# Altium PCB STM32F103.PcbDoc (part 3 of 5)
Units mil, origin at the board's own origin, x right, y up, seen from the top; angles counter-clockwise.
Board outline 3951 x 3526 mil, 2 copper layers (Top Layer, Bottom Layer); 148 components, 169 nets, 748 pads, 448 vias.
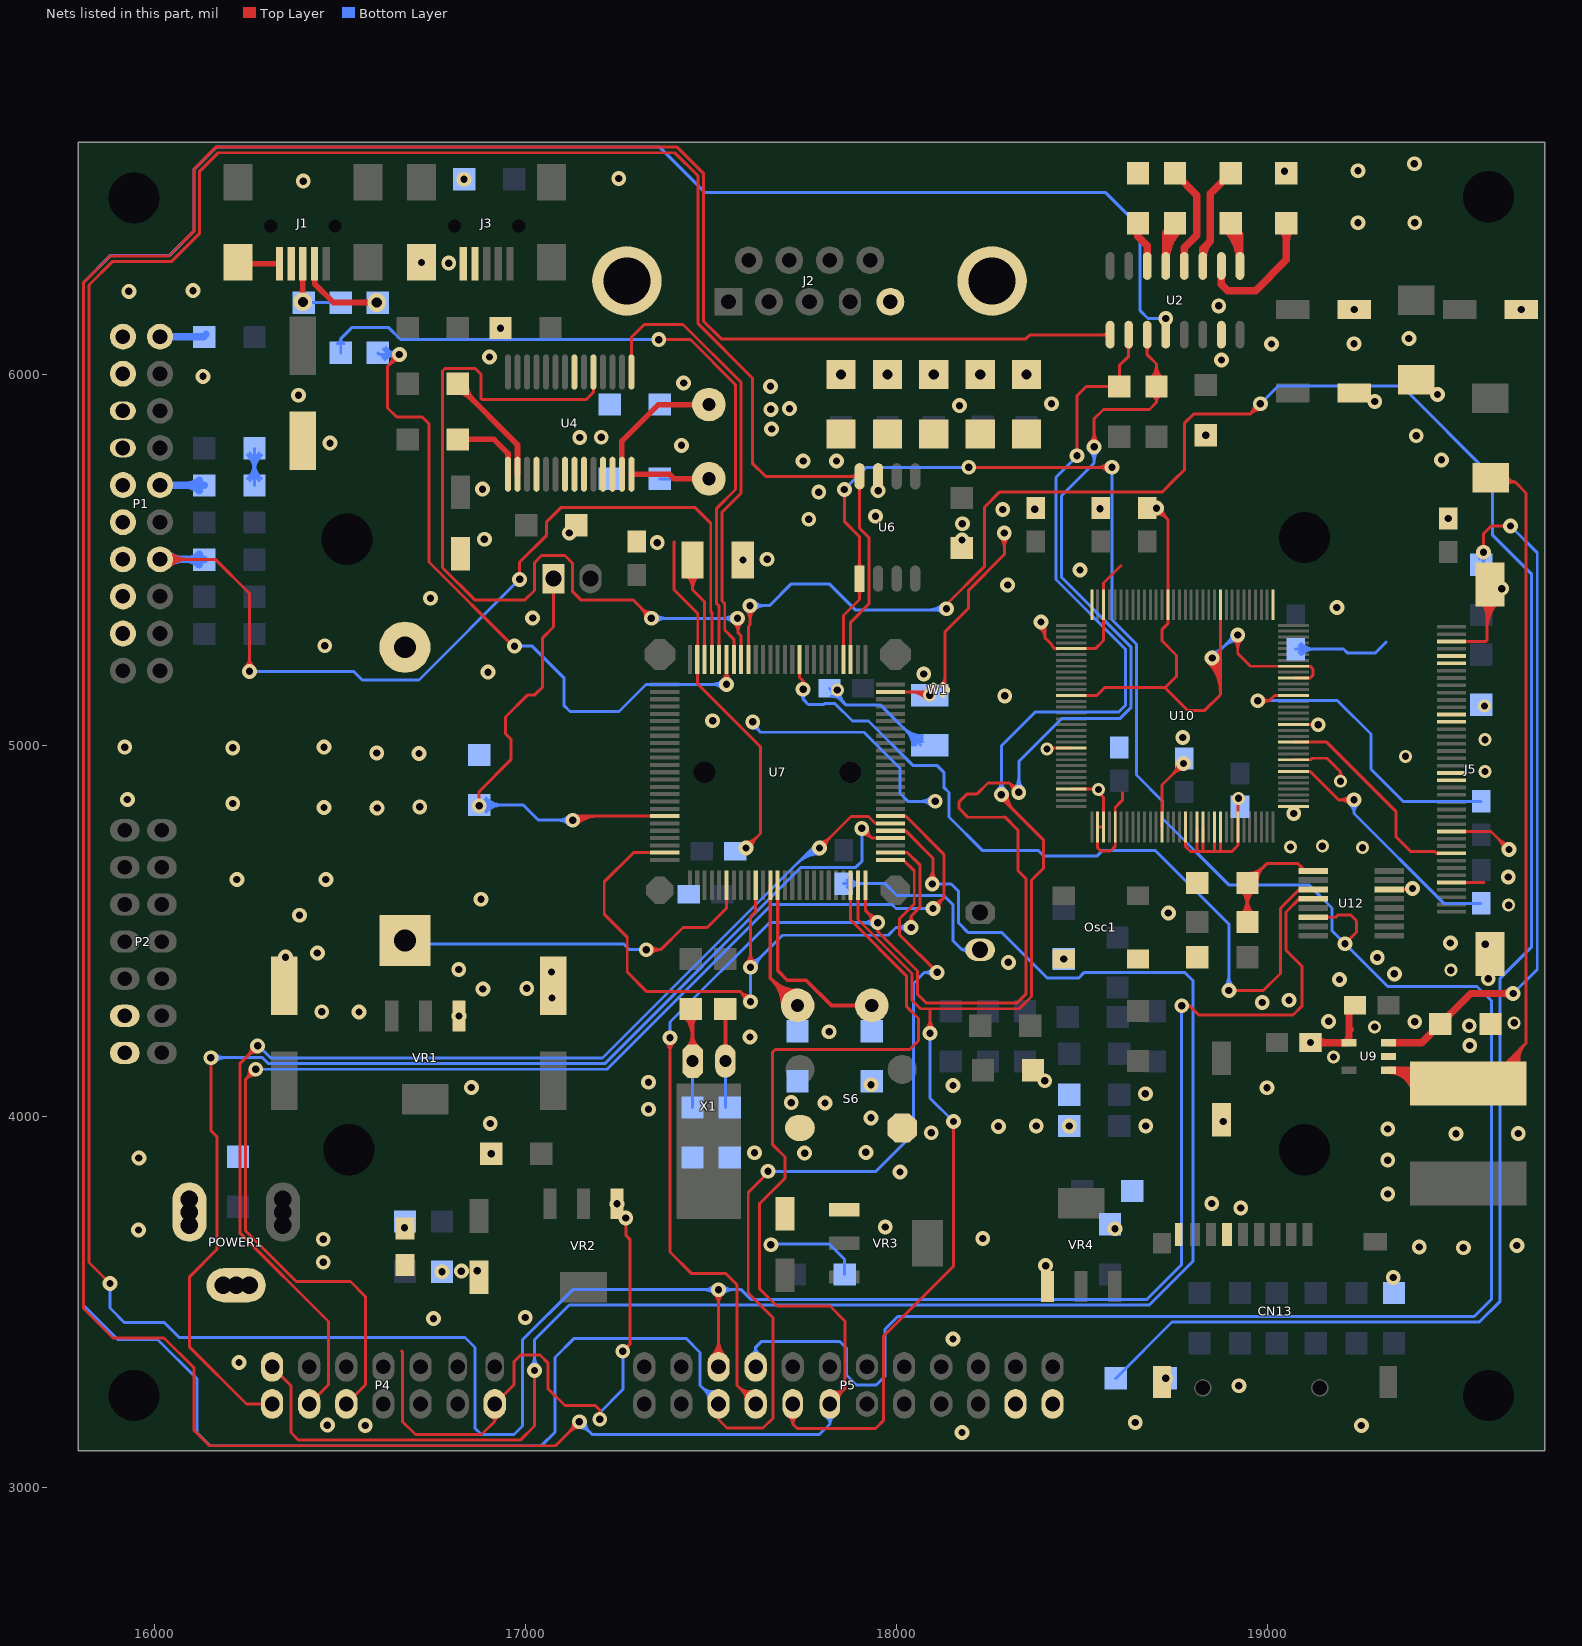
[diagram p3: the nets of this part, all layers, seen from the top]

## Via types
v1: diameter 40, hole 19.68, Top Layer to Bottom Layer, 402 vias
v2: diameter 35, hole 19.68, Top Layer to Bottom Layer, 21 vias
v3: diameter 50, hole 27.56, Top Layer to Bottom Layer, 19 vias
v4: diameter 40, hole 20, Top Layer to Bottom Layer, 6 vias

## Nets (pads, with @x,y where several pads share a name; then routed paths per layer and width w, separated by ;. In a path a pad name is that pad's centre, name@x,y a point inside that pad or via, vN(x,y) a via of type N, cw(c..) or ccw(c..) an arc to the next point about the centre after c; other vN are vias at no path point) (continued)
GND: BT1.2 C1.2 C2.2 C3.2 C4.2 C5.2 C6.2 C7.2 C8.1 C10.1 C12.1 C13.2 C14.1 C15.1 C16.1 C17.1 C18.2 C19.2 C20.1 C21.2 C22.2 C23.2 C24.2 C26.1 C30.2 C31.2 C32.2 C33.2 C34.1 C40.2 C41.1 C42.1 C43.1 C44.1 C45.2 C46.2 C47.2 C48.1 C49.2 C50.2 C58.1 C59.2 C60.2 C61.2 C62.2 C63.2 C64.2 C65.2 C66.2 C67.2 C68.1 CN13.6 CN13.9 D1.2 D2.2 D5.2 D6.2 D8.2 D9.2 D10.1 J1.4 J1.5 J1.6 J2.5 J2.10 J2.11 J3.4 J3.5 J3.6 J5.3 J5.5 J5.6 J5.13 J5.14 J5.21 J5.22 J5.29 J5.36 J5.41 J5.42 K2.2 L3.1 Osc1.2 P1.4 P1.6 P1.8 P1.10 P1.12 P1.14 P1.16 P1.18 P1.20 P2.11 P2.13 P4.13 P5.21 P5.23 POWER1.2 R41.1 R45.1 S6.1 U2.15 U4.7 U4.18 U4.21 U4.22 U4.23 U4.25 U4.26 U6.7 U7.10 U7.27 U7.74 U7.99 U9.2 U10.2 U10.3 U10.5 U10.13 U10.17 U10.19 U10.20 U10.22 U10.23 U10.26 U10.33 U10.41 U10.47 U10.55 U10.57 U10.65 U10.74 U10.83 U10.94 U10.96 U10.101 U10.109 U10.118 U10.125 U12.6 VR1.1 VR2.1 VR3.1 VR4.1 W1.1 | length 13935.4
  Top Layer w8: 16666,3369 16668,3367 16668,3179 16703.5,3143.5 16881.5,3143.5 16917,3179 ; P4.13@16908.19,3191.54 cw(c16903.68,3179) 16917,3179 ; P4.13@16925.81,3191.54 ccw(c16930.32,3179) 16917,3179 ; v4(17200,3185) 17200,3210 17188,3222 17106,3222 17060,3268 17060,3337 17039,3358 16987,3358 16969,3340 16969,3278 P4.13@16917,3226 16917,3179 ; v4(17262,3368) 17281,3387 17281,3670 17270,3681 v1(17270,3727) ; U7.99@17375.09,4711.6 17290.6,4711.6 17212,4633 17212,4545.43 17274,4483.43 17274,4389.79 17326.79,4337 17579,4337 ; 17401,5549 17400,5549 17400,5420 17464,5356 17464,5233.58 U7.74@17462.69,5232.27 17462.69,5167.15 17633,4996.84 17633,4852 ; U7.74@17461.63,5267.2 ccw(c17455.89,5272.93) 17464,5272.93 ; v1@17590,4310.13 ccw(c17552.44,4310.44) 17579,4337 ; v1(17594,4724) 17633,4763 17633,4852 ; v1@17594,4740 ccw(c17594,4778.63) 17621.31,4751.31 ccw(c17648.63,4724) v1@17610,4724 ; v1@17594.69,4414.31 ccw(c17567.37,4441.63) 17606,4441.63 ccw(c17644.63,4441.63) v1@17617.31,4414.31 ; v1@17605.87,4326 cw(c17605.56,4363.56) 17579,4337 ; v1(17606,4310) 17579,4337 ; v1(17606,4403) 17606,4538.83 17620.17,4553 U7.10@17620.17,4588 ; 17633,4781 17633,4852 ; U7.27@17983.35,4711.6 18029.4,4711.6 18062.32,4678.68 18062.32,4564.32 18039,4541 ; v1@18029.73,4523.04 ccw(c18016.97,4541) 18039,4541 ; v1(18039,4510) 18039,4541 ; v1@18048.27,4523.04 cw(c18061.03,4541) 18039,4541 ; W1.1@18122.22,5165.78 ccw(c18103.44,5184.56) 18130,5184.56 ; W1.1@18130,5158 18130,5307 18193.88,5370.88 18193.88,5418.66 18290,5514.79 v1(18290,5573) ; v1@18278.69,5561.69 cw(c18251.37,5534.37) 18290,5534.37 cw(c18328.63,5534.37) v1@18301.31,5561.69 ; v1@18381.64,5318.79 cw(c18366.02,5288.62) 18400,5288.62 ; v1@18385.32,5325.9 cw(c18372.83,5301.77) 18400,5301.77 ; v1(18389,5333) cw(c18379.64,5314.92) 18400,5314.92 ; v1@18401,5330 18400,5329 18400,5290 18418.45,5271.55 18418.45,5268.29 18425.64,5261.1 U10.101@18470.79,5261.1 18535.1,5261.1 18557.4,5283.4 U10.94@18557.4,5379.21 18557.4,5438.47 18602.94,5484 18604,5484 ; v2(18405,4991) 18407.39,4993.39 U10.118@18470.79,4993.39 ; 18422.35,5264.39 ccw(c18430.93,5272.96) U10.101@18433.45,5261.1 ; U10.125@18470.79,4883.15 18534.85,4883.15 18557.4,4860.6 U10.3@18557.4,4780.79 U10.2@18541.65,4780.79 ; U10.109@18470.79,5135.12 18539.12,5135.12 18560,5156 18723.21,5156 ; U10.2@18541.65,4771 18541.65,4724.35 18550,4716 18576,4716 18588.9,4728.9 U10.5@18588.9,4780.79 18588.9,4833.5 18608,4852.6 18608,4873 ; v2@18544,4868.5 cw(c18544,4855.22) 18553.39,4864.61 ; C65.2@18672.82,5645.78 cw(c18679.53,5612.61) v1@18703.46,5636.54 ; C65.2@18674.41,5637.94 cw(c18683.08,5595.07) v1@18714,5626 ; C65.2@18675.99,5630.1 cw(c18686.62,5577.54) 18724.54,5615.46 ; v1@18700,5624 cw(c18700,5585.37) 18727.31,5612.69 cw(c18754.63,5640) v1@18716,5640 ; v1(18700,5640) 18730.63,5609.37 18730.63,5466.99 U10.83@18730.63,5379.21 18730.63,5328.6 18715.38,5313.35 18715.38,5281.62 18754,5243 18754,5186.79 18723.21,5156 ; U10.13@18714.88,4780.79 18714.88,4893.88 v1(18773,4952) ; v1@18757,4952 cw(c18718.37,4952) 18745.69,4924.69 cw(c18773,4897.37) v1@18773,4936 ; U10.17@18777.87,4780.79 18777.87,4729.13 18792,4715 18810,4715 ; U10.19@18809.37,4780.79 18809.37,4715.63 18810,4715 ; U10.20@18825.12,4780.79 18825.12,4717.12 18823,4715 ; v1@18838.69,5224.69 cw(c18757.39,5143.39) 18872.36,5143.39 ; v1@18844.34,5230.34 cw(c18776.7,5162.7) 18872.36,5162.7 ; v1(18850,5236) cw(c18796.01,5182.01) 18872.36,5182.01 ; v1@18855.66,5241.66 cw(c18815.33,5201.33) 18872.36,5201.33 ; U10.22@18856.61,4780.79 18856.61,4718.61 18853,4715 ; v1@18861.31,5247.31 cw(c18834.64,5220.64) 18872.36,5220.64 ; 18866.97,5252.97 cw(c18853.95,5239.95) 18872.36,5239.95 ; U10.23@18872.36,4780.79 18872.36,4717.36 18870,4715 ; U10.74@18872.36,5379.21 18872.36,5137.36 18829,5094 18785.21,5094 18723.21,5156 ; v1@18907.69,5286.69 cw(c18880.37,5259.37) 18919,5259.37 cw(c18957.63,5259.37) v1@18930.31,5286.69 ; v1(18919,5298) 18919,5248 18953.14,5213.86 U10.57@19069.21,5213.86 19114.36,5213.86 19121.55,5206.67 19121.55,5189.55 19114.36,5182.36 U10.55@19069.21,5182.36 ; v2(18921,4858) 18919.61,4856.61 U10.26@18919.61,4780.79 18919.61,4731.61 18903,4715 18870,4715 ; U10.41@19069.21,4961.89 19115.89,4961.89 19120,4966 ; U10.47@19069.21,5056.38 v1@19146.62,5056.38 ; U10.57@19106.55,5213.86 cw(c19108.5,5200.19) 19118.26,5209.95 ; 19153.79,4966 19140,4966 ; v2@19188.48,4915.21 ccw(c19179.03,4929.31) 19196,4929.31 ; v2(19196,4904) 19196,4929.31 ; v2@19203.52,4915.21 cw(c19212.97,4929.31) 19196,4929.31 ; U12.6@19327.36,4612.5 19381.5,4612.5 v1@19387,4619 ; U12.6@19361.6,4609.76 cw(c19368.21,4603.15) 19368.21,4612.5 cw(c19368.21,4621.85) U12.6@19361.6,4615.24 ; J5.36@19495,4631.03 19581.97,4631.03 ; J5.29@19495,4768.82 19601.18,4768.82 v1(19649.7,4720.3) ; J5.3@19495,5280.63 19587.63,5280.63 19590,5283 J5.41@19590,5441 ; J5.41@19573.34,5389.48 cw(c19533.1,5349.25) 19590,5349.25 ; J5.41@19578.99,5395.13 cw(c19552.42,5368.56) 19590,5368.56 ; 19590,5308.95 cw(c19703.89,5308.95) J5.41@19623.36,5389.48 ; 19590,5328.26 cw(c19684.57,5328.26) J5.41@19617.7,5395.13 ; 19590,5347.57 cw(c19665.26,5347.57) J5.41@19612.04,5400.79 ; 19590,5366.89 cw(c19645.94,5366.89) J5.41@19606.39,5406.45 ; v1@19633.7,4720.3 ccw(c19595.07,4720.3) 19622.38,4747.62 ccw(c19649.7,4774.93) v1@19649.7,4736.3 ; U7.10@17620.17,4588 U7.10@17620.17,4624 U7.10@17620.17,4588 ; 18810,4715 18823,4715 ; 18823,4715 18853,4715 ; 18853,4715 18870,4715 ; 19120,4966 19140,4966 ; 19120,4966 19140,4966 ; 19140,4966 19159.31,4966 19196,4929.31
  Top Layer w15: J1.6@16228.74,6297.94 J1.5@16337.01,6297.94
  Bottom Layer w8: v4(17200,3185) 17199,3184 17199,3202 17262,3265 v4(17262,3368) ; v1(17606,4310) v1(17606,4403) 17692,4489 17977,4489 17998,4510 v1(18039,4510) ; v1@17606,4419 ccw(c17606,4457.63) 17633.31,4430.31 ccw(c17660.63,4403) v1@17622,4403 ; v1@17612,5048 cw(c17612,5026.27) 17627.36,5041.64 ; v1@17613,5056 17633,5036 17911.85,5036 18009,4938.85 18009,4871 18030,4850 v1(18104,4850) ; v1@17626.45,5057.14 ccw(c17640.48,5050.48) 17629.5,5039.5 ; v4(17661,3655) 17663,3657 17818,3657 17860,3615 C45.2@17860,3575 ; C44.1@17819,5154 17863,5110 17956,5110 C40.2@18064,5002 ; C44.1@17824,5133 cw(c17824,5094.37) 17851.31,5121.69 ; C44.1@17836.98,5153.33 ccw(c17873.98,5151.41) 17847.78,5125.22 ; C44.1@17844.7,5147.15 ccw(c17859.66,5138.08) 17847.29,5125.71 ; C44.1@17844.97,5152.91 ccw(c17898.15,5150.16) 17860.5,5112.5 ; v2@17851.54,5143 ccw(c17868.63,5132.63) 17854.5,5118.5 ; C26.1@17857,4628 17969,4628 18001,4596 18127,4596 18152,4571 18152,4474 18176,4450 ; C26.1@17866.19,4618.81 cw(c17888.38,4596.62) 17888.38,4628 cw(c17888.38,4659.38) C26.1@17866.19,4637.19 ; C26.1@17871.85,4613.15 cw(c17907.7,4577.3) 17907.7,4628 cw(c17907.7,4678.7) C26.1@17871.85,4642.85 ; 18017.79,5048.21 ccw(c18069,5099.43) C40.2@18069,5027 ; 18027.44,5038.56 cw(c17989.89,5001) C40.2@18043,5001 ; v1@18027.69,4498.69 ccw(c18000.37,4471.37) 18000.37,4510 ccw(c18000.37,4548.63) v1@18027.69,4521.31 ; 18031.44,5034.56 ccw(c18069,5072.11) C40.2@18069,5019 ; C40.2@18041.1,5024.9 cw(c18017.2,5001) C40.2@18051,5001 ; C40.2@18045.1,5020.9 ccw(c18069,5044.8) C40.2@18069,5011 ; v1@18092.69,4838.69 ccw(c18065.37,4811.37) 18065.37,4850 ccw(c18065.37,4888.63) v1@18092.69,4861.31 ; K2.2@18191,4440 ccw(c18176,4433.75) 18176,4450 ; K2.2@18191,4460 cw(c18176,4466.25) 18176,4450 ; K2.2@18225,4450 18176,4450 ; v1(18773,4952) C67.2@18773,4953 ; v1(18850,5236) 18912,5298 v1(18919,5298) ; v1@18850,5252 ccw(c18850,5290.63) 18877.31,5263.31 ccw(c18904.63,5236) v1@18866,5236 ; 18879.74,5265.74 cw(c18919,5226.47) v1@18919,5282 ; 18893.39,5279.39 cw(c18919,5253.79) v1@18919,5290 ; 18896.64,5282.64 ccw(c18881.27,5298) v1@18903,5298 ; C63.2@19075,5260 19203.92,5260 19213.92,5250 19290,5250 19319,5279 ; C63.2@19084.19,5250.81 cw(c19106.38,5228.62) 19106.38,5260 cw(c19106.38,5291.38) C63.2@19084.19,5269.19 ; C63.2@19089.85,5245.15 cw(c19125.7,5209.3) 19125.7,5260 cw(c19125.7,5310.7) C63.2@19089.85,5274.85 ; v1@19146.62,5056.38 v1@19147,5056 ; v1@19486,5611 19486.48,5611.48 v1(19486.48,5612) ; 19613,5446 19630,5429 v1(19630,5423)
  other v1: 18176,3149 16568,3168 19252,3168 16466,3169 18643,3176 18922,3275 16228,3338 18152,3401 16752,3456 16999,3459 19338,3567 16775,3582.5 16827,3584 16870,3585 18401.45,3598.81 16455,3608 19527,3647 19408,3649 19671,3653 16455,3670 18232,3672 15957,3695 18588,3698 17969,3703 18927,3754 17246.55,3765.2 18849,3766 19323,3792 18009,3851 19323,3883 15958,3889 16907.5,3900 17752,3902 17617,3903 17917,3904 19507,3954 19675,3955 18093,3957 19323,3967 18274,3974 18376,3975 18465,3975 18671,3975 16905,3982 18880,3987.32 17931,3997 17331,4020 17807,4037 17716,4038 18670,4062 18998,4078 16854,4079 18152,4084 17931,4086 17331,4093 18399,4097 19544,4192 17605,4215 17818,4229 19543,4245 19396,4256 19164,4257 16820.55,4271.2 16551,4282 16451,4283 18985,4308 19057,4314 17071,4320 16885,4344 17003,4346 19193,4370 19594,4372 19341,4385 17070,4390 16820,4397 18301,4416 19295,4429 16353,4430 16439,4441 19586,4465 19492,4468 16391,4543 18732,4549 16880,4586 19390,4615 16222,4639 16462,4639 19648,4646 19070,4817 16600,4832 16457,4833 16715,4835 16211,4844 15927,4855 16713,4979 16599,4980 16211,4994 15920,4996 16457,4996 18771,5022 19136,5056.38 17612,5064 17504,5067 18291,5134 18073,5193 16899,5198 16459,5269 17019,5344 19186,5372 16744,5397 18299,5433 18494,5473 17586,5500 17651,5502 17355,5547 18176,5554 16889,5556 17118,5573 18177,5598 17763,5610 17943,5618 18286,5636 18372,5637 18548,5638 17790,5683 17950,5687 16884,5691 17748,5767 17838,5767 19468,5770 17420,5809 16473,5815 17146,5830 17204,5831 19400,5835 18833,5836.5 17663,5853 17661,5906 17711,5908 18169,5916 18417,5921 19288,5927 16388,5944 19457,5946 17660,5968 17426,5977 16131,5995 18875,6039 16903,6047 19010,6082 19232,6083 19380,6097 16932.5,6125 19232.68,6175 19682.68,6175 18868,6185 15931,6224 16104,6226 16793,6300 16719.8,6301.88 19243,6409 19396,6409 16401,6521 16834,6526 17251,6528 19045,6547.5 19243,6549 19395,6568
  other v2: 19177,4161 19288,4242 19664,4253 19493,4395 19649,4570 19255,4725 19061,4727 19147,4729 18544,4882 19585,4930 19371,4971 19585,5016 19584,5107 17840,5150
HSYNC: J5.32 U10.44 | length 597.9
  Top Layer w8: U10.44@19069.21,5009.13 19158.6,5009.13 19346,4821.73 19346,4754 19385,4715 19449.52,4715 19454.76,4709.77 J5.32@19495,4709.77 ; 19452.46,4712.06 ccw(c19457.33,4716.94) J5.32@19460.21,4710.67
INT: U7.60 U12.11 | length 2348
  Top Layer w8: U7.60@17738.28,5232.27 17738.28,5183.72 17748,5174 ; v1@17743.07,5167.22 ccw(c17740.88,5174) 17748,5174 ; 17743.36,5178.64 cw(c17726.75,5162.02) v1(17748,5152) 17748,5174 ; v1@17752.93,5167.22 cw(c17755.12,5174) 17748,5174 ; v1(18895,4340) 18988,4340 19034,4386 19034,4561.66 19084.84,4612.5 U12.11@19122.64,4612.5
  Bottom Layer w8: v1@17740.32,5137.97 cw(c17733.22,5125) 17748,5125 ; v1(17748,5152) 17748,5125 ; v1@17755.68,5137.97 ccw(c17762.78,5125) 17748,5125 ; v1@18883.69,4351.31 ccw(c18856.37,4378.63) 18895,4378.63 ccw(c18933.63,4378.63) v1@18906.31,4351.31 ; v1(18895,4340) 18895,4519 18696,4718 18555.16,4718 18539.16,4702 18397,4702 18381,4718 18230.57,4718 18140.94,4807.63 18140.94,4873.84 18127,4887.79 18127,4928 18108,4947 18043.28,4947 17924.28,5066 17881,5066 17834,5113 17806.16,5113 17804.16,5111 17762,5111 17748,5125
MISO: P5.6 U6.8 U7.53 U12.12 | length 11966.5
  Top Layer w8: v1(15880,3550.77) 15880.11,3550.89 15823.5,3607.5 15823.5,6241.29 15886.21,6304 16045.21,6304 16122,6380.79 16122,6547.79 16171.71,6597.5 17402.29,6597.5 17465,6534.79 17465,6136.79 17611,5990.79 17611,5761 17646.41,5725.59 U6.8@17900,5725.59 17900,5586 17925,5561 17925,5381.45 17876.07,5332.52 U7.53@17876.07,5232.27 ; P5.6@17501.62,3354.38 ccw(c17457.23,3398.77) 17520,3398.77 ccw(c17582.77,3398.77) P5.6@17538.38,3354.38 ; P5.6@17507.27,3348.73 ccw(c17476.54,3379.46) 17520,3379.46 ccw(c17563.46,3379.46) P5.6@17532.73,3348.73 ; v1@17508.69,3522.69 cw(c17481.37,3495.37) 17520,3495.37 cw(c17558.63,3495.37) v1@17531.31,3522.69 ; P5.6@17520,3326 v1(17520,3534) ; U6.8@17893.08,5718.67 ccw(c17876.39,5701.98) 17876.39,5725.59 ccw(c17876.39,5749.2) U6.8@17893.08,5732.5 ; v1(18768,4299) 18788.57,4299 ; v1@18783.51,4295.06 cw(c18788.57,4293.78) 18788.57,4299 ; v1@18783.51,4302.94 ccw(c18788.57,4304.22) 18788.57,4299 ; U12.12@19122.64,4587.5 19084.5,4587.5 19049,4552 19049,4448.79 19092.64,4405.15 19092.64,4299.06 19067.57,4274 18814,4274 18788.78,4299.22 18788.57,4299
  Bottom Layer w8: v1(15880,3550.77) 15880,3484.64 15919.64,3445 16026.88,3445 16066.88,3405 16837,3405 16864,3378 16864,3292 ; 16864,3195 16864,3292 ; v1@17508.69,3522.69 ccw(c17481.37,3495.37) 17481.37,3534 ccw(c17481.37,3572.63) v1@17508.69,3545.31 ; v1@17531.31,3522.69 cw(c17558.63,3495.37) 17558.63,3534 cw(c17558.63,3572.63) v1@17531.31,3545.31 ; v1(18768,4299) 18767,4299 18767,3600.43 18674.57,3508 17607,3508 17581,3534 v1(17520,3534) 17127,3534 16992,3399 16992,3167 16968.5,3143.5 16881,3143.5 16864,3160.5 16864,3292
MOSI: P5.8 U6.1 U7.54 U12.14 | length 6874.9
  Top Layer w8: U7.54@17856.39,5232.27 17856.39,5350.39 17900,5394 U6.1@17900,5450 17900,5563 17860,5603 17860,5689 v1(17859,5690) ; U6.1@17893.08,5421.43 cw(c17876.39,5404.73) 17900,5404.73 cw(c17923.61,5404.73) U6.1@17906.92,5421.43 ; U6.1@17893.08,5478.57 ccw(c17876.39,5495.26) 17900,5495.26 ccw(c17923.61,5495.26) U6.1@17906.92,5478.57 ; v1(18194,5750) v1(18580,5750) ; v1@18568.69,5738.69 ccw(c18541.37,5711.37) 18541.37,5750 ccw(c18541.37,5788.63) v1@18568.69,5761.31 ; U12.14@19122.64,4537.5 19182.78,4537.5 19189.28,4544 19223,4544 19239,4528 19239,4497 v1(19208,4466) ; U12.14@19156.87,4534.76 cw(c19163.49,4528.15) 19163.49,4537.5 cw(c19163.49,4546.85) U12.14@19156.87,4540.24
  Bottom Layer w8: P5.8@17607.92,3359.02 ccw(c17597.45,3379) 17620,3379 ; P5.8@17620,3326 17620,3379 ; P5.8@17632.08,3359.02 cw(c17642.55,3379) 17620,3379 ; v1(17859,5690) 17919,5750 v1(18194,5750) v1@18193,5751 ; v1(18580,5750) 18580,5338.85 18646,5272.85 18646,4920.84 18716.42,4850.42 18716.42,4803.65 18895.07,4625 19110.57,4625 19173,4562.57 19173,4501 v1(19208,4466) 19323,4351 19564,4351 19603.21,4311.79 19603.21,3509.21 19556,3462 18003,3462 17968,3427 17968,3300 17945,3277 17892,3277 17865,3304 17865,3376 17847,3394 17635,3394 17620,3379
NetBT1_1: BT1.1 U7.6 | length 1008.7
  Top Layer w8: v1(17325,4450) 17364,4450 17424,4510 17489.43,4510 17541.43,4562 U7.6@17541.43,4624 ; v1@17336.31,4438.69 cw(c17363.63,4411.37) 17363.63,4450 cw(c17363.63,4488.63) v1@17336.31,4461.31
  Bottom Layer w8: BT1.1@16708,4465 17265,4465 17280,4450 v1(17325,4450)
NetC9_1: C9.1 U2.3 | length 324.1
  Top Layer w20: U2.3@18825,6292.52 18825,6339 18845,6359 18845,6487.5 C9.1@18900,6542.5 ; U2.3@18826.81,6318.11 cw(c18881.61,6318.11) 18842.86,6356.86
NetC9_2: C9.2 U2.1 | length 300.8
  Top Layer w8: C9.2@18900,6407.5 18900,6397 C9.2@18904,6397
  Top Layer w20: C9.2@18885.86,6393.36 cw(c18791.36,6298.86) U2.1@18925,6298.86 ; C9.2@18900,6407.5 cw(c18839.64,6347.14) 18925,6347.14 ; C9.2@18904,6397 18906,6397 18925,6378 U2.1@18925,6292.52
NetC10_2: C10.2 U2.2 | length 440.3
  Top Layer w20: U2.2@18875,6292.52 18875,6243 18892,6226 18967,6226 19050,6309 C10.2@19050,6407.5 ; C10.2@19035.86,6393.36 cw(c19001.72,6359.22) 19050,6359.22 cw(c19098.28,6359.22) C10.2@19064.14,6393.36
NetC11_1: C11.1 U2.5 | length 297.3
  Top Layer w20: U2.5@18725,6292.52 18725,6382.5 C11.1@18750,6407.5 ccw(c18810.36,6347.14) 18725,6347.14 ; U2.5@18725,6298.86 cw(c18858.64,6298.86) C11.1@18764.14,6393.36
NetC11_2: C11.2 U2.4 | length 288.5
  Top Layer w20: C11.2@18750,6542.5 18809,6483.5 18809,6375 18775,6341 U2.4@18775,6292.52
NetC12_2: C12.2 U2.6 | length 213.6
  Top Layer w20: C12.2@18650,6407.5 18650,6372 ; U2.6@18675,6292.52 18675,6347 18650,6372 ; 18650,6372 cw(c18671.5,6372) 18660.36,6390.39 ccw(c18671.5,6372) 18650,6372 ; 18650,6372 ccw(c18628.5,6372) 18639.64,6390.39 cw(c18628.5,6372) 18650,6372
NetC14_2: C14.2 U4.28 Y1.1 | length 346.2
  Top Layer w15: U4.28@17285.34,5731.2 17388.2,5731.2 17400.4,5719 Y1.1@17494,5719
  Bottom Layer w8: C14.2@17361.5,5719 17422.72,5719 ; 17422.73,5719 Y1.1@17494,5719
NetC16_2: C16.2 U4.27 Y1.2 | length 497
  Top Layer w15: U4.27@17259.75,5731.2 17259.75,5820.75 17358,5919 Y1.2@17494,5919
  Bottom Layer w8: C16.2@17361.5,5919 17427,5919 Y1.2@17494,5919
NetC22_1: C22.1 R23.1 X1.2 | length 323.1
  Top Layer w8: R23.1@17515,4285 17515,4290 R23.1@17515,4296
  Top Layer w10: R23.1@17515,4285 R23.1@17520,4290 ; X1.2@17538.5,4150 R23.1@17538.5,4273
  Bottom Layer w8: C22.1@17538.5,4025.5 X1.2@17538.5,4150 17538.5,4092.5
NetC23_1: C23.1 R24.1 X1.1 | length 529.4
  Top Layer w10: R24.1@17427.32,4272.32 cw(c17372.57,4217.57) 17450,4217.57 ; X1.1@17434.09,4183.41 ccw(c17395.68,4221.82) 17450,4221.82 ccw(c17504.32,4221.82) X1.1@17465.91,4183.41 ; R24.1@17434.39,4279.39 cw(c17396.72,4241.72) 17450,4241.72 cw(c17493.28,4241.72) R24.1@17462.68,4272.32 ; X1.1@17441.16,4176.34 ccw(c17419.82,4197.68) 17450,4197.68 ccw(c17480.18,4197.68) X1.1@17458.84,4176.34 ; X1.1@17450,4150 R24.1@17450,4285
  Bottom Layer w8: C23.1@17450,4025 X1.1@17450,4150
NetC24_1: C24.1 U7.73 | length 436.8
  Top Layer w8: C24.1@17432.22,5461.03 cw(c17393.78,5420) 17450,5420 ; C24.1@17437.69,5466.87 cw(c17411.08,5438.46) 17450,5438.46 cw(c17488.92,5438.46) C24.1@17462.31,5466.87 ; C24.1@17450,5500 17450,5420 ; C24.1@17467.78,5461.03 ccw(c17506.22,5420) 17450,5420 ; U7.73@17482.37,5232.27 17482.37,5387.63 17450,5420
NetC32_1: C32.1 U7.13 X2.2 | length 525.7
  Top Layer w10: U7.13@17679.22,4624 17679.22,4393.78 17705,4368 17756,4368 17824,4300 X2.2@17933,4300 X2.2@17931,4298
NetC33_1: C33.1 U7.12 X2.1 | length 698.9
  Top Layer w10: U7.12@17659.54,4624 17659.54,4451.47 17659.54,4373.47 X2.1@17733,4300 ; X2.1@17692.73,4300 ccw(c17595.49,4300) 17664.25,4368.75 ccw(c17733,4437.51) X2.1@17733,4340.28 ; X2.1@17702.73,4300 ccw(c17629.64,4300) 17681.32,4351.68 ccw(c17733,4403.37) X2.1@17733,4330.28 ; X2.1@17712.73,4300 ccw(c17663.78,4300) 17698.39,4334.61 ccw(c17733,4369.23) X2.1@17733,4320.28
NetC40_1: C40.1 U7.49 W1.2 | length 253.3
  Top Layer w8: U7.49@17983.35,5144.67 W1.2@18094,5144.67 ; 18035.48,5144.67 cw(c18035.48,5082.48) v2@18079.45,5126.45 ; 18054.79,5144.67 cw(c18054.79,5101.79) v2@18085.11,5132.11 ; 18066.82,5144.67 ccw(c18066.82,5182.18) W1.2@18093.34,5155.66 ; 18071.48,5144.67 ccw(c18071.48,5165.52) W1.2@18086.22,5150.78 ; W1.2@18086.13,5144.67 ccw(c18086.13,5162.87) W1.2@18099,5150
  other v2: 18089,5136
NetC48_2: C48.2 R40.1 U9.3 | length 2237.8
  Top Layer w8: v1(19581,5521) 19581,5571 19602,5592 v1(19654,5592)
  Top Layer w20: U9.3@19325,4199.8 19414.8,4199.8 C48.2@19465,4250 19547,4332 v1(19661,4332) ; v1@19653.93,4324.93 ccw(c19636.86,4307.86) 19636.86,4332 ccw(c19636.86,4356.14) v1@19653.93,4339.07
  Bottom Layer w8: R40.1@19568.1,5512.07 ccw(c19563.44,5529) v1@19581,5529 ; R40.1@19570.22,5504.35 ccw(c19566.33,5518.5) v1@19581,5518.5 ; R40.1@19572.88,5507.22 cw(c19564.5,5493) R40.1@19581,5493 ; R40.1@19575,5487 R40.1@19581,5493 ; R40.1@19589.12,5507.22 ccw(c19597.5,5493) R40.1@19581,5493 ; R40.1@19591.39,5507.19 cw(c19609.1,5529) v1@19581,5529 ; v1(19654,5592) 19726,5520 19726,4708 ; v1(19661,4332) 19726,4397 19726,4493 ; R40.1@19581,5493 v1(19581,5521) v1@19581,5529 ; 19726,4493 19726,4602.76 ; 19726,4493 19726,4602.76 ; 19726,4602.76 19726,4708 ; 19726,4602.76 19726,4708
NetC68_2: C68.2 L8.2 U12.9 | length 856.6
  Top Layer w8: L8.2@18926.62,4543.38 ccw(c18882.23,4587.77) 18945,4587.77 ccw(c19007.77,4587.77) L8.2@18963.38,4543.38 ; C68.2@18926.62,4611.62 cw(c18882.23,4567.23) 18945,4567.23 cw(c19007.77,4567.23) C68.2@18963.38,4611.62 ; L8.2@18932.27,4537.73 ccw(c18901.54,4568.46) 18945,4568.46 ccw(c18988.46,4568.46) L8.2@18957.73,4537.73 ; C68.2@18932.27,4617.27 cw(c18901.54,4586.54) 18945,4586.54 cw(c18988.46,4586.54) C68.2@18957.73,4617.27 ; L8.2@18945,4525 C68.2@18945,4630 18997,4682 19081.27,4682 19091.27,4672 ; C68.2@18945,4648 ccw(c18945,4691.46) 18975.73,4660.73 ccw(c19006.46,4630) C68.2@18963,4630 ; C68.2@18945,4656 ccw(c18945,4718.77) 18989.38,4674.38 ccw(c19033.77,4630) C68.2@18971,4630 ; 19086.46,4676.81 cw(c19079.44,4669.8) U12.9@19087.86,4664.55 ; U12.9@19088.43,4665.27 ccw(c19081.86,4672) 19091.27,4672 ; 19091.27,4671.55 ccw(c19100.19,4671.55) U12.9@19093.88,4665.24 ; 19091.38,4671.89 cw(c19081.99,4662.5) U12.9@19095.27,4662.5 ; U12.9@19122.64,4662.5 19091.27,4662.5 19091.27,4672
NetCB1_2: CB1.2 CB2.2 CB4.2 U9.4 | length 308.5
  Top Layer w20: CB1.2@19115,4199.8 U9.4@19218.7,4199.8 ; CB1.2@19122.07,4192.93 cw(c19138.67,4176.33) CB1.2@19138.67,4199.8 ; CB1.2@19122.07,4207.07 ccw(c19139.62,4224.62) CB1.2@19139.62,4199.8 ; CB1.2@19130.61,4189.39 cw(c19155.74,4164.26) 19155.74,4199.8 ; CB1.2@19130.61,4210.61 ccw(c19156.69,4236.69) 19156.69,4199.8 ; 19216.7,4210 19218.7,4212 19218.7,4297.7 19221,4300 CB2.2@19235,4300 ; 19218.7,4232 19221.7,4235
  other v1: 19115,4200
NetCB3_1: CB3.1 U10.39 | length 806.1
  Top Layer w8: U10.39@19069.21,4930.39 19114.36,4930.39 19126.5,4918.25 19126.5,4918.19 19190.69,4854 v1(19232,4854) ; U10.39@19106.55,4930.39 cw(c19108.5,4916.73) 19118.26,4926.49 ; v1@19220.69,4842.69 ccw(c19193.37,4815.37) 19193.37,4854 ccw(c19193.37,4892.63) v1@19220.69,4865.31
  Bottom Layer w8: v1@19221.03,4842.35 cw(c19197.08,4816.94) 19232,4816.94 ; v1@19233,4854 v1(19232,4854) 19232,4816.94 ; v1@19242.97,4842.35 ccw(c19266.92,4816.94) 19232,4816.94 ; CB3.1@19575,4575 19473.94,4575 19232,4816.94
NetCB5_1: CB5.1 U10.52 | length 913.7
  Top Layer w8: v1(18973,5121) 19004,5121 ; v1@18986.04,5111.73 cw(c19004,5098.97) 19004,5121 ; v1@18986.04,5130.27 ccw(c19004,5143.03) 19004,5121 ; U10.52@19069.21,5135.12 19018.12,5135.12 19004,5121
  Bottom Layer w8: v1(18973,5121) 19188,5121 19278,5031 19278,4936.4 19364.4,4850 CB5.1@19575,4850
NetCN13_10: CN13.10 R129.2
  other v1: 18725,3295
NetD1_1: D1.1 R29.2
  other v1: 16674,3701
NetD2_1: D2.1 R30.2 | length 7.5
  Bottom Layer w8: R30.2@17850,5992.5 v3(17850,6000)
NetD3_1: D3.1 L6.2 U9.1 | length 2656.5
  Top Layer w8: D3.1@19600.2,5710.9 19666.1,5710.9 ; L6.2@19631,4134 19696,4199 ; D3.1@19636.24,5697.82 cw(c19666.1,5670.29) 19666.1,5710.9 ; D3.1@19637.13,5726.89 ccw(c19656.44,5730.55) 19656.44,5710.9 ; L6.2@19644.5,4093.59 cw(c19688.11,4119.42) 19652.27,4155.27 ; D3.1@19644.99,5728.38 ccw(c19666.1,5732.38) 19666.1,5710.9 ; L6.2@19651.38,4097.67 cw(c19697.27,4124.85) 19659.56,4162.56 ; L6.2@19658.26,4101.75 cw(c19706.42,4130.27) 19666.84,4169.84 ; L6.2@19665.15,4105.82 cw(c19715.58,4135.69) 19674.13,4177.13 ; L6.2@19672.03,4109.9 cw(c19724.73,4141.11) 19681.42,4184.42 ; L6.2@19678.91,4113.98 cw(c19733.89,4146.53) 19688.71,4191.71 ; L6.2@19685.8,4118.05 cw(c19743.04,4151.95) 19696,4199 ; 19666.1,5710.9 19696,5681 19696,4199
  Top Layer w20: 19352.74,4125 cw(c19352.74,4060.43) L6.2@19414.01,4080.82 ; 19380.48,4125 cw(c19380.48,4069.66) L6.2@19432.98,4087.14 ; L6.2@19395.03,4074.51 ccw(c19325,4051.19) U9.1@19325,4125 19414,4125 L6.2@19422,4133
NetD5_1: D5.1 R33.2 | length 7.5
  Bottom Layer w8: R33.2@17975,5992.5 v3(17975,6000)
NetD6_1: D6.1 R35.2 | length 7.5
  Bottom Layer w8: R35.2@18100,5992.5 v3(18100,6000)
NetD8_1: D8.1 R31.2 | length 7.5
  Bottom Layer w8: R31.2@18350,5992.5 v3(18350,6000)
NetD9_1: D9.1 R32.2 | length 9.3
  Bottom Layer w8: v3(18225,6000) 18226.5,6000 R32.2@18232,5994.5
NetJ1_2: J1.2 R10.2 | length 245.1
  Top Layer w15: J1.2@16431.5,6297.94 16431.5,6244.5 16482,6194 v3(16599,6194)
  Bottom Layer w8: v3(16599,6194) 16601.5,6194 R10.2@16602,6193.5
NetJ1_3: J1.3 R9.2 R11.2 | length 205.3
  Top Layer w15: v3(16400,6195.5) J1.3@16400,6297.94
  Bottom Layer w8: v3(16400,6195.5) R11.2@16402,6193.5 R9.2@16502,6193.5
NetJ1_5: 
Netk1_1: K1.1 R45.2 U7.94 | length 1698.3
  Top Layer w8: v1(16875,4838) 16875,4876.7 16960.15,4961.85 16960.15,5017.85 16946,5032 16946,5077.05 17005.95,5137 17024.79,5137 17046,5158.21 17046,5290.43 17075,5319.43 K1.1@17075,5450 ; v1@17115,4789 17136.02,4810.02 U7.94@17375.09,4810.02 ; v1(17127,4799) cw(c17153.61,4772.39) 17153.61,4810.02 ; v1@17132.66,4793.34 cw(c17172.93,4753.07) 17172.93,4810.02 ; v1@17138.31,4787.69 cw(c17192.24,4733.76) 17192.24,4810.02
  Bottom Layer w8: R45.2@16875,4840 16994,4840 17035,4799 v1(17127,4799) ; R45.2@16880.66,4832.34 cw(c16899.14,4813.86) R45.2@16899.14,4840 ; R45.2@16886.31,4826.69 cw(c16918.46,4794.54) 16918.46,4840 ; R45.2@16886.31,4849.31 ccw(c16908.8,4871.8) 16908.8,4840 ; R45.2@16887.73,4827.27 cw(c16918.46,4796.54) 16918.46,4840 ; R45.2@16887.73,4852.73 ccw(c16918.46,4883.46) 16918.46,4840 ; R45.2@16893.38,4821.62 cw(c16937.77,4777.23) 16937.77,4840 cw(c16937.77,4902.77) R45.2@16893.38,4858.38 ; v1@17115.69,4787.69 ccw(c17088.37,4760.37) 17088.37,4799 ccw(c17088.37,4837.63) v1@17115.69,4810.31
NetOsc1_1: Osc1.1 R42.1
  other v1: 18450,4425
NetP1_11: P1.11 R6.1 | length 195.8
  Bottom Layer w20: P1.11@16015,5702 16133.5,5702 R6.1@16134.5,5701 ; 16083.8,5702 cw(c16083.8,5650.3) R6.1@16120.36,5686.86 ; 16088.63,5702 ccw(c16088.63,5746.87) R6.1@16120.36,5715.14
NetP1_19: P1.19 R7.1 | length 126.5
  Bottom Layer w20: P1.19@16015,6102 16133,6102 R7.1@16139,6108
NetR5_1: R5.1 R6.2 | length 433.7
  Bottom Layer w8: R6.2@16251.12,5719.38 ccw(c16206.73,5763.77) 16269.5,5763.77 ccw(c16332.27,5763.77) R6.2@16287.88,5719.38 ; R5.1@16251.12,5782.62 cw(c16206.73,5738.23) 16269.5,5738.23 cw(c16332.27,5738.23) R5.1@16287.88,5782.62 ; R6.2@16256.77,5713.73 ccw(c16226.04,5744.46) 16269.5,5744.46 ccw(c16312.96,5744.46) R6.2@16282.23,5713.73 ; R5.1@16256.77,5788.27 cw(c16226.04,5757.54) 16269.5,5757.54 cw(c16312.96,5757.54) R5.1@16282.23,5788.27 ; R6.2@16269.5,5701 R5.1@16269.5,5801
NetR18_2: R18.2 U4.16 | length 395.7
  Top Layer w15: R18.2@16817.5,5952.5 cw(c16817.5,5906.63) 16849.94,5939.06 ; R18.2@16817.5,5975 16817.5,5971.5 16978.25,5810.75 U4.16@16978.25,5731.2 ; R18.2@16840,5975 ccw(c16902.77,5975) 16858.38,5930.62
NetR19_1: R19.1 U4.15 | length 206.9
  Top Layer w15: R19.1@16817.5,5825 16915,5825 16952.66,5787.34 U4.15@16952.66,5731.2
NetU7_10: 
PA0: P5.11 U2.9 U7.23 | length 11001
  Top Layer w8: v1@17129,3178 cw(c17090.37,3178) 17117.69,3150.69 cw(c17145,3123.37) v1@17145,3162 ; v1(17145,3178) 17080.5,3113.5 16148.5,3113.5 16106,3156 16106,3324 16026,3404 15888,3404 15808.5,3483.5 15808.5,6247.5 15880,6319 16039,6319 16107,6387 16107,6554 16165.5,6612.5 17408.5,6612.5 17480,6541 17480,6143 17527,6096 18348,6096 18359,6107 18563,6107 ; P5.11@17820,3226 17861,3267 ; P5.11@17825.73,3252.9 ccw(c17834.89,3275.92) 17852.4,3258.4 ; P5.11@17828.69,3260.34 ccw(c17839.78,3288.22) 17861,3267 ; P5.11@17843.5,3238.5 cw(c17870.06,3238.5) 17851.28,3257.28 ; U7.23@17876.07,4624 17876.07,4529.93 18026,4380 18026,4298 18059,4265 18059,4205 18035,4181 17673,4181 17665,4173 17665,3925.79 17699,3891.79 17699,3833.95 17630,3764.95 17630,3537.43 17677.43,3490 17820,3490 17861,3449 17861,3267 ; 18554.98,6107 ccw(c18554.98,6127.5) U2.9@18569.48,6113 ; 18557.3,6107 cw(c18557.3,6089.78) U2.9@18569.48,6101.96 ; U2.9@18575,6107.48 18575,6107 18563,6107 ; 18563,6107 cw(c18563,6101.32) 18568.05,6103.92 ccw(c18563,6101.32) 18563,6107 ; 18563,6107 ccw(c18563,6112.02) 18567.69,6110.24 cw(c18563,6112.02) 18563,6107
  Bottom Layer w8: v1@17145,3162 cw(c17145,3123.37) 17172.31,3150.69 cw(c17199.63,3178) v1@17161,3178 ; v1(17145,3178) 17179.5,3143.5 17791.5,3143.5 17820,3172 ; P5.11@17807.91,3193.35 cw(c17795.11,3172) 17820,3172 ; P5.11@17820,3226 17820,3172 ; P5.11@17832.09,3193.35 ccw(c17844.89,3172) 17820,3172
PA1: P5.9 R13.2 U2.10 U7.24 | length 4860.4
  Top Layer w8: P5.9@17707.91,3193.35 cw(c17695.11,3172) 17720,3172 ; P5.9@17720,3226 17720,3172 ; P5.9@17732.09,3193.35 ccw(c17744.89,3172) 17720,3172 ; U7.24@17895.76,4624 17895.76,4531.46 18041,4386.21 18041,4314 18064,4291 18090,4291 ; v1@18078.69,4236.31 ccw(c18051.37,4263.63) 18090,4263.63 ccw(c18128.63,4263.63) v1@18101.31,4236.31 ; v1(18090,4225) 18090,4291 ; v1(18153,3987) 18153,3597 17964,3408 17964,3181 17943,3160 17732,3160 17720,3172 ; v1@18282,4852 cw(c18282,4834.07) 18294.68,4846.75 ; v1(18282,4868) 18288.37,4861.63 18288.37,4853.06 18395,4746.43 18395,4669 18363,4637 18363,4324 18330,4291 18090,4291 ; v1@18290,4868 ccw(c18330.01,4868) 18301.72,4839.71 ; v1@18298,4868 ccw(c18357.33,4868) 18315.38,4826.05 ; v1(18486,5781) 18486,5943 18510.5,5967.5 R13.2@18600,5967.5 18600,6024 18625,6049 U2.10@18625,6107.48 ; U2.10@18619.48,6076.37 cw(c18606.14,6063.03) 18625,6063.03 cw(c18643.86,6063.03) U2.10@18630.52,6076.37
  Bottom Layer w8: v1(18090,4225) 18090,4050 v1(18153,3987) ; v1@18270.69,4879.31 ccw(c18243.37,4906.63) 18282,4906.63 ccw(c18320.63,4906.63) v1@18293.31,4879.31 ; v1(18282,4868) 18282,4999 18374,5091 18598.79,5091 18616,5108.21 18616,5260.43 18429,5447.43 18429,5723 18486,5780 v1(18486,5781)
PA2: P5.7 R14.2 U2.11 U7.25 | length 5901.3
  Top Layer w8: v1@17377.69,4201.69 cw(c17350.37,4174.37) 17389,4174.37 cw(c17427.63,4174.37) v1@17400.31,4201.69 ; v1(17389,4213) 17389,3941 17389,3635.43 17446.43,3578 17539,3578 17570,3547 17570,3276 P5.7@17620,3226 ; 17575,3271 ccw(c17602.52,3298.51) P5.7@17613,3261.04 ; 17582.69,3263.31 cw(c17555.37,3236) P5.7@17594,3236 ; 17584.68,3261.32 ccw(c17606.75,3283.39) P5.7@17615.15,3253.33 ; 17594.35,3251.65 ccw(c17610.98,3268.27) P5.7@17617.31,3245.63 ; U7.25@17915.44,4624 17915.44,4556.56 v1(17949,4523) 17949,4499.43 ; v1@17933,4523 ccw(c17894.37,4523) 17921.69,4550.31 ccw(c17949,4577.63) v1@17949,4539 ; v1@18313.03,4875.02 ccw(c18281.99,4877.02) 18303.99,4899.01 ; v1@18327.98,4889.97 cw(c18325.98,4921.01) 18303.99,4899.01 ; v1(18329,4874) 18303.98,4899.02 ; v1@18520.69,5816.31 ccw(c18493.37,5843.63) 18532,5843.63 ccw(c18570.63,5843.63) v1@18543.31,5816.31 ; v1(18532,5805) 18532,5881 18557,5906 18681,5906 18700,5925 ; U2.11@18669.48,6076.37 cw(c18656.14,6063.03) 18675,6063.03 cw(c18693.86,6063.03) U2.11@18680.52,6076.37 ; U2.11@18675,6107.48 18675,6053 18700,6028 ; R14.2@18682.11,5986.36 ccw(c18642.62,6028) 18700,6028 ; R14.2@18687.61,5980.56 ccw(c18660.27,6009.38) 18700,6009.38 ccw(c18739.73,6009.38) R14.2@18712.39,5980.56 ; R14.2@18688.16,5944.35 cw(c18678.27,5925) 18700,5925 ; R14.2@18711.84,5944.35 ccw(c18721.73,5925) 18700,5925 ; R14.2@18717.89,5986.36 cw(c18757.38,6028) 18700,6028 ; 17949,4499.43 cw(c17958.37,4499.43) 17954.91,4508.13 ccw(c17958.37,4499.43) 17949,4499.43 ; 17949,4499.43 ccw(c17939.63,4499.43) 17943.09,4508.13 cw(c17939.63,4499.43) 17949,4499.43 ; 17949,4499.43 18056,4392.43 18056,4330 18080,4306 18323.79,4306 18348,4330.21 18348,4642 18327,4663 18327,4772 18291,4808 18290,4807 18191.7,4807 18168.46,4830.24 18168.46,4848.46 18190,4870 18217,4870 18246.02,4899.02 18303.98,4899.02 ; 18700,5925 R14.2@18700,5967.5 18700,6028
  Bottom Layer w8: v1(17389,4213) 17389,4255 17657,4523 v1(17949,4523) ; v1@17937.69,4511.69 ccw(c17910.37,4484.37) 17910.37,4523 ccw(c17910.37,4561.63) v1@17937.69,4534.31 ; v1@18317.69,4885.31 ccw(c18290.37,4912.63) 18329,4912.63 ccw(c18367.63,4912.63) v1@18340.31,4885.31 ; v1(18329,4874) 18329,4957.16 18445.39,5073.55 18602.55,5073.55 18631,5102 18631,5266.64 18444,5453.64 18444,5673 18532,5761 v1(18532,5805) ; v1@18520.69,5793.69 cw(c18493.37,5766.37) 18532,5766.37 cw(c18570.63,5766.37) v1@18543.31,5793.69
PA3: P5.5 U2.12 U7.26 | length 11151.1
  Top Layer w8: P5.5@17520,3226 17520,3184 17543,3161 17640,3161 17666.5,3187.5 17666.5,3458.5 17600,3525 17600,3796 17657,3853 v1(17653,3853) ; U7.26@18012.09,4691.91 U7.26@17997,4691.91 ; v1(18109,4389) 18008,4490 18008,4534 18047.32,4573.32 18047.32,4662.6 18018,4691.91 U7.26@17997,4691.91 ; v1@18713.69,6139.69 cw(c18686.37,6112.37) 18725,6112.37 cw(c18763.63,6112.37) v1@18736.31,6139.69 ; U2.12@18719.68,6138.79 ccw(c18708.33,6151) v1(18725,6151) ; U2.12@18725,6107.48 v1(18725,6151) ; U2.12@18730.32,6138.79 cw(c18741.67,6151) v1(18725,6151) ; U7.26@17997,4691.91 U7.26@17983.35,4691.91 U7.26@17997,4691.91
  Bottom Layer w8: 17475,3271 ccw(c17502.52,3298.51) P5.5@17513,3261.04 ; 17482.69,3263.31 cw(c17455.37,3236) P5.5@17494,3236 ; 17484.68,3261.32 ccw(c17506.75,3283.39) P5.5@17515.15,3253.33 ; 17494.35,3251.65 ccw(c17510.98,3268.27) P5.5@17517.31,3245.63 ; P5.5@17520,3226 17470,3276 17470,3365 17432,3403 17131,3403 17079,3351 17079,3150 17042.5,3113.5 16149.5,3113.5 16114.34,3148.66 16114.34,3293.91 16008.24,3400 15901,3400 15809,3492 15809,6248 15882,6321 16041,6321 16106,6386 16106,6552 16166.5,6612.5 17361.5,6612.5 17484,6490 18563,6490 18656,6397 18656,6172 18677,6151 v1(18725,6151) ; v1(17653,3853) 17944,3853 18045,3954 18045,4359 18075,4389 ; v1@18096.67,4378.8 ccw(c18075,4360.88) 18075,4389 ; v1@18096.67,4399.2 cw(c18075,4417.12) 18075,4389 ; v1(18109,4389) 18075,4389
PA4: P4.1 U7.29 | length 3382.8
  Top Layer w8: v1(16152,4159) 16152,3963 16168,3947 16168,3642 16095,3569 16095,3379 16248,3226 P4.1@16317,3226 ; v1(17906,4777) 17932.03,4750.97 ; v1@17906.55,4761.01 cw(c17907.74,4726.68) 17932.03,4750.97 ; v1@17921.99,4776.45 ccw(c17956.32,4775.26) 17932.03,4750.97 ; U7.29@17983.35,4750.97 17932.03,4750.97
  Bottom Layer w8: v1(16152,4159) 16291,4159 16307,4143 17213.36,4143 17742.36,4672 17890,4672 17906,4688 v1(17906,4777) ; v1@16163.31,4147.69 cw(c16190.63,4120.37) 16190.63,4159 cw(c16190.63,4197.63) v1@16163.31,4170.31
PA5: P4.2 U7.30 | length 4974.4
  Top Layer w8: P4.2@16317,3326 16368,3275 16368,3149 16388.5,3128.5 16985.5,3128.5 17024,3167 v1(17024,3316) ; U7.30@17983.35,4770.65 18024.09,4770.65 18098,4696.75 18098,4627 v1(18096,4627) ; U7.30@18017.77,4769.26 cw(c18021.09,4760.78) 18027.53,4767.22 ; v1@18084.69,4638.31 ccw(c18052.54,4670.46) 18098,4670.46 ; v1@18090.34,4632.66 ccw(c18071.86,4651.14) 18098,4651.14 ; 18098,4660.8 ccw(c18129.8,4660.8) v1@18107.31,4638.31
  Bottom Layer w8: v1@17012.69,3327.31 ccw(c16985.37,3354.63) 17024,3354.63 ccw(c17062.63,3354.63) v1@17035.31,3327.31 ; v1(17024,3316) 17024,3399 17118,3493 18680.79,3493 18799,3611.21 18799,4365.84 18775.84,4389 18505.67,4389 18490,4373.33 18406.67,4373.33 18284,4496 18193,4496 18167,4522 18167,4606.79 18146.79,4627 v1@18099,4627 ; v1@18099,4627 v1(18096,4627) v1@18099,4627
PA6: P4.3 U7.31 | length 3373.7
  Top Layer w8: v1@16262,4191 cw(c16223.37,4191) 16250.69,4163.69 cw(c16278,4136.37) v1@16278,4175 ; v1(16278,4191) 16230,4143 16230,3687.21 16469,3448.21 16469,3278 P4.3@16417,3226 ; v1(17792,4724) 17877,4809 17923.95,4809 17942.61,4790.34 U7.31@17983.35,4790.34 ; v1@17792,4740 ccw(c17792,4778.63) 17819.31,4751.31 ccw(c17846.63,4724) v1@17808,4724
  Bottom Layer w8: v1@16280.21,4191 16313.21,4158 17207.15,4158 17773.15,4724 v1(17792,4724) ccw(c17792,4678.49) 17759.82,4710.67 ; 17732.5,4683.36 cw(c17792,4623.86) v1@17792,4708 ; 17746.16,4697.01 cw(c17792,4651.17) v1@17792,4716
PA7: P4.5 U7.32 | length 3644.4
  Top Layer w8: v1@16257,4128 cw(c16218.37,4128) 16245.69,4100.69 cw(c16273,4073.37) v1@16273,4112 ; v1(16273,4128) 16245,4100 16245,3693.43 16382.43,3556 16528,3556 16569,3515 16569,3278 P4.5@16517,3226 ; U7.32@17983.35,4810.02 18024.09,4810.02 18127,4707.12 18127,4590 v1(18098,4561) ; U7.32@18017.77,4808.63 cw(c18021.09,4800.15) 18027.53,4806.59 ; v1@18098,4577 ccw(c18098,4615.63) 18125.31,4588.31 ccw(c18152.63,4561) v1@18114,4561
  Bottom Layer w8: v1(16273,4128) 17219.57,4128 17663.57,4572 17987,4572 17998,4561 v1(18098,4561)
PA8: R129.1 U7.67 | length 6412.4
  Top Layer w8: v1@17593.69,5365.69 cw(c17566.37,5338.37) 17605,5338.37 cw(c17643.63,5338.37) v1@17616.31,5365.69 ; U7.67@17600.48,5232.27 17600.48,5320.48 17605,5325 v1(17605,5377) ; v1(18134,5369) 18134,5380 18237,5483 18237,5643 18278,5684 18716,5684 18749.5,5717.5 18775,5743 18775,5868.3 18799.7,5893 18952,5893 v1(18980,5921) ; v1@18964,5921 cw(c18925.37,5921) 18952.69,5893.69 cw(c18980,5866.37) v1@18980,5905
  Bottom Layer w8: v1(17605,5377) 17657,5377 17716,5436 17818.05,5436 17888.05,5366 v1@18134,5366 ; v1@17616.31,5365.69 cw(c17643.63,5338.37) 17643.63,5377 cw(c17643.63,5415.63) v1@17616.31,5388.31 ; 18088.13,5366 ccw(c18088.13,5414.87) v1@18122.69,5380.31 ; 18102.62,5366 cw(c18102.62,5337.62) v1@18122.69,5357.69 ; 18107.44,5366 ccw(c18107.44,5395.56) v1@18128.34,5374.66 ; R129.1@18590,3295 18742,3447 19570,3447 19626,3503 19626,4373 19711,4458 19711,5462 19605,5568 19605,5724.79 19361,5968.79 19361,5969 19028,5969 v1(18980,5921)
PA9: U4.5 U7.68 | length 2498.7
  Top Layer w8: U4.5@17180.15,5964.72 cw(c17173.32,5957.89) 17182.98,5957.89 cw(c17192.63,5957.89) U4.5@17185.8,5964.72 ; U4.5@17182.98,6006.79 17182.98,5952 17163.98,5933 16882.16,5933 16880.51,5934.65 16880.51,6000 16864.51,6016 16782.94,6016 16776.5,6009.56 16776.5,5479.4 16863.17,5392.73 16998.73,5392.73 17024,5418 17024,5493 17043,5512 17106,5512 17126,5492 17126,5415.73 17149,5392.73 17289.27,5392.73 v1(17339,5343) ; v1@17323,5343 ccw(c17284.37,5343) 17311.69,5370.31 ccw(c17339,5397.63) v1@17339,5359 ; v1@17560.56,5330.88 cw(c17537.2,5303.75) 17573,5303.75 ; v1@17565.78,5336.94 cw(c17552.22,5321.19) 17573,5321.19 ; 17573,5309.2 cw(c17604.8,5309.2) v1@17582.31,5331.69 ; v1@17573,5341 17573,5303.8 17580.8,5296 U7.68@17580.8,5232.27
  Bottom Layer w8: v1(17339,5343) v1(17571,5343) v1@17573,5341 ; v1@17350.31,5331.69 cw(c17377.63,5304.37) 17377.63,5343 cw(c17377.63,5381.63) v1@17350.31,5354.31 ; v1@17559.69,5331.69 ccw(c17532.37,5304.37) 17532.37,5343 ccw(c17532.37,5381.63) v1@17559.69,5354.31
PA10: U4.1 U7.69 | length 1264.5
  Top Layer w8: U4.1@17282.51,6048.87 ccw(c17275.68,6055.69) 17285.34,6055.69 ccw(c17294.99,6055.69) U4.1@17288.17,6048.87 ; U4.1@17285.34,6006.79 17285.34,6100.34 17320,6135 17424.36,6135 17581,5978.36 17581,5680.94 17529,5628.94 17529,5389.95 17536.74,5382.21 17536.74,5311.26 17561.11,5286.89 U7.69@17561.11,5232.27
PA11: R10.1 U7.70 | length 2207.2
  Top Layer w8: v1@16644,6054 cw(c16605.37,6054) 16632.69,6026.69 cw(c16660,5999.37) v1@16660,6038 ; v1(16660,6054) 16628,6022 16628,5910 16652,5886 16721,5886 16740,5867 16740,5494.69 16966.69,5268 v1(16970,5268) ; v1@17530.11,5176.31 ccw(c17502.8,5203.63) 17541.43,5203.63 ccw(c17580.05,5203.63) v1@17552.74,5176.31 ; v1(17541.43,5165) U7.70@17541.43,5232.27
  Bottom Layer w8: R10.1@16602,6058.5 16607.2,6053.3 16607.91,6054 v1(16660,6054) cw(c16660,6098.39) R10.1@16623.42,6073.23 ; R10.1@16614.73,6045.77 cw(c16634.59,6025.91) 16634.59,6054 ; R10.1@16616.83,6068.7 ccw(c16644.79,6087.93) v1@16644.79,6054 ; R10.1@16620.38,6040.12 cw(c16653.91,6006.59) v1@16653.91,6054 ; v1@16648.69,6042.69 ccw(c16621.37,6015.37) 16621.37,6054 ccw(c16621.37,6092.63) v1@16648.69,6065.31 ; v1(16970,5268) 17018,5268 17103.06,5182.94 17103.06,5108.63 17120,5091.69 17251.49,5091.69 17324.8,5165 v1(17541.43,5165) ; v1@17530.11,5153.69 ccw(c17502.8,5126.37) 17502.8,5165 ccw(c17502.8,5203.63) v1@17530.11,5176.31
PA12: R9.1 U7.71 | length 1977.2
  Top Layer w8: v1(17359,6094) 17444.15,6094 17566,5972.15 17566,5690.2 17514,5638.2 17514,5383.74 17521.74,5376 U7.71@17521.74,5232.27
  Bottom Layer w8: R9.1@16492.88,6082.85 ccw(c16487.96,6096) 16502,6096 ; R9.1@16502,6058.5 16502,6096 ; R9.1@16511.12,6082.85 cw(c16516.04,6096) 16502,6096 ; v1(17359,6094) 16663,6094 16630,6127 16533,6127 16502,6096
PA13: P1.7 R3.1 U7.72 | length 2981.1
  Top Layer w8: P1.7@16015,5502 16164.16,5502 16256,5410.16 v1(16256,5200) ; P1.7@16025.61,5491.39 cw(c16051.21,5465.79) 16051.21,5502 cw(c16051.21,5538.21) P1.7@16025.61,5512.61 ; P1.7@16031.26,5485.74 cw(c16070.53,5446.47) 16070.53,5502 cw(c16070.53,5557.53) P1.7@16031.26,5518.26 ; P1.7@16036.92,5480.08 cw(c16089.84,5427.16) 16089.84,5502 cw(c16089.84,5576.84) P1.7@16036.92,5523.92 ; v1@16244.69,5211.31 ccw(c16217.37,5238.63) 16256,5238.63 ccw(c16294.63,5238.63) v1@16267.31,5211.31 ; v1(16984,5448) 16984,5494 17057,5567 17057,5603 17096,5642 17456,5642 17499,5599 17499,5362 17502.05,5358.95 U7.72@17502.05,5232.27
  Bottom Layer w8: v1(16256,5200) 16537,5200 16560,5177 16713,5177 v1(16984,5448)
  Bottom Layer w20: P1.7@16015,5502 16133.5,5502 R3.1@16134.5,5501 ; P1.7@16032.68,5484.32 cw(c16075.36,5441.64) 16075.36,5502 cw(c16075.36,5562.36) P1.7@16032.68,5519.68 ; 16083.8,5502 cw(c16083.8,5450.3) R3.1@16120.36,5486.86 ; 16088.63,5502 ccw(c16088.63,5546.87) R3.1@16120.36,5515.14